# Altium PCB MicroPlayerPCB.PcbDoc
Units mm, origin at the board's own origin, x right, y up, seen from the top; angles counter-clockwise.
Board outline 26 x 30 mm, 4 copper layers (Top Layer 1, Top Layer 2, Bottom Layer 2, Bottom Layer 1), stack 1.282 mm thick; 84 components, 66 nets, 330 pads, 151 vias.
Unrouted connection lines stored in the file: 1.
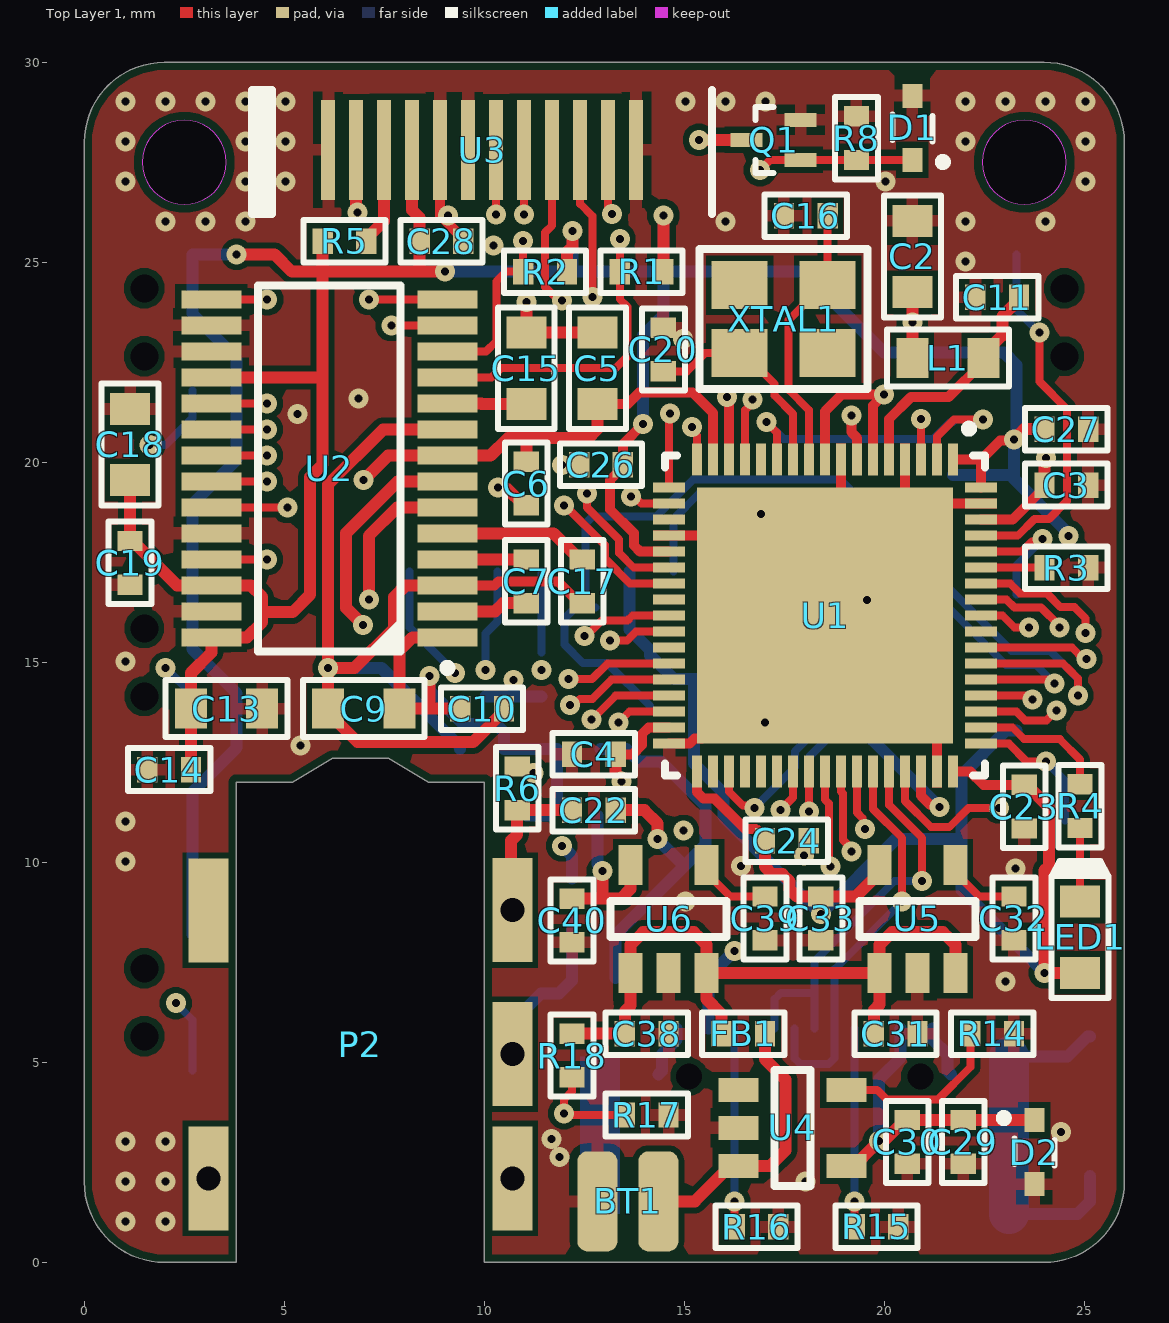
[diagram p0: Top Layer 1 view]
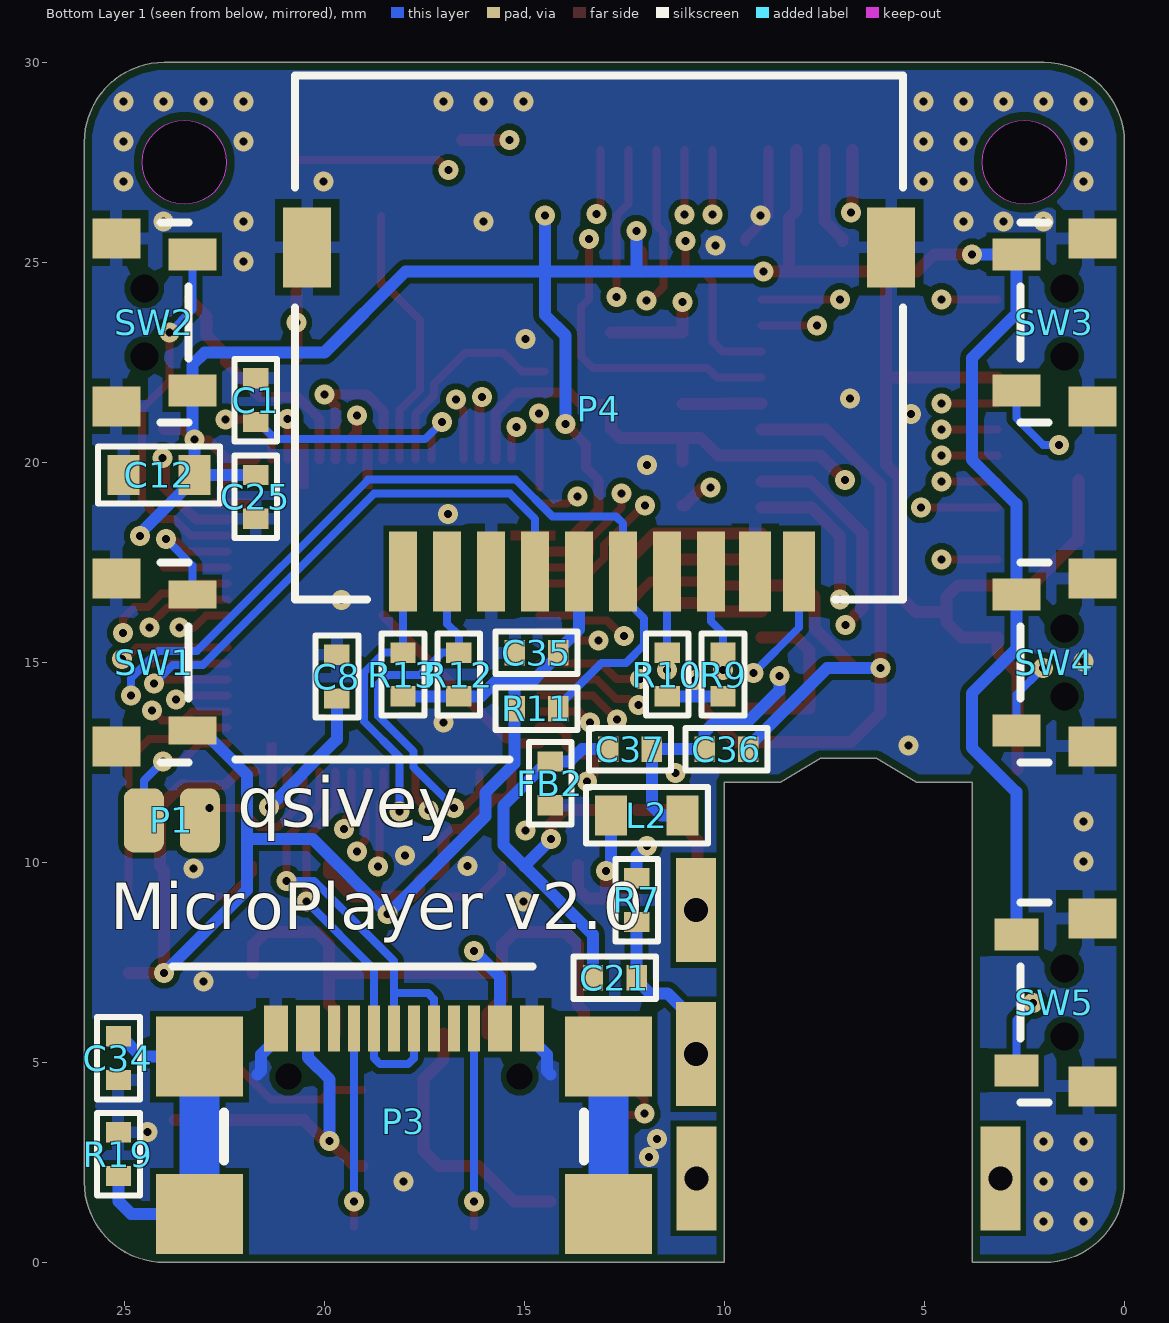
[diagram p1: Bottom Layer 1 view, seen from below]
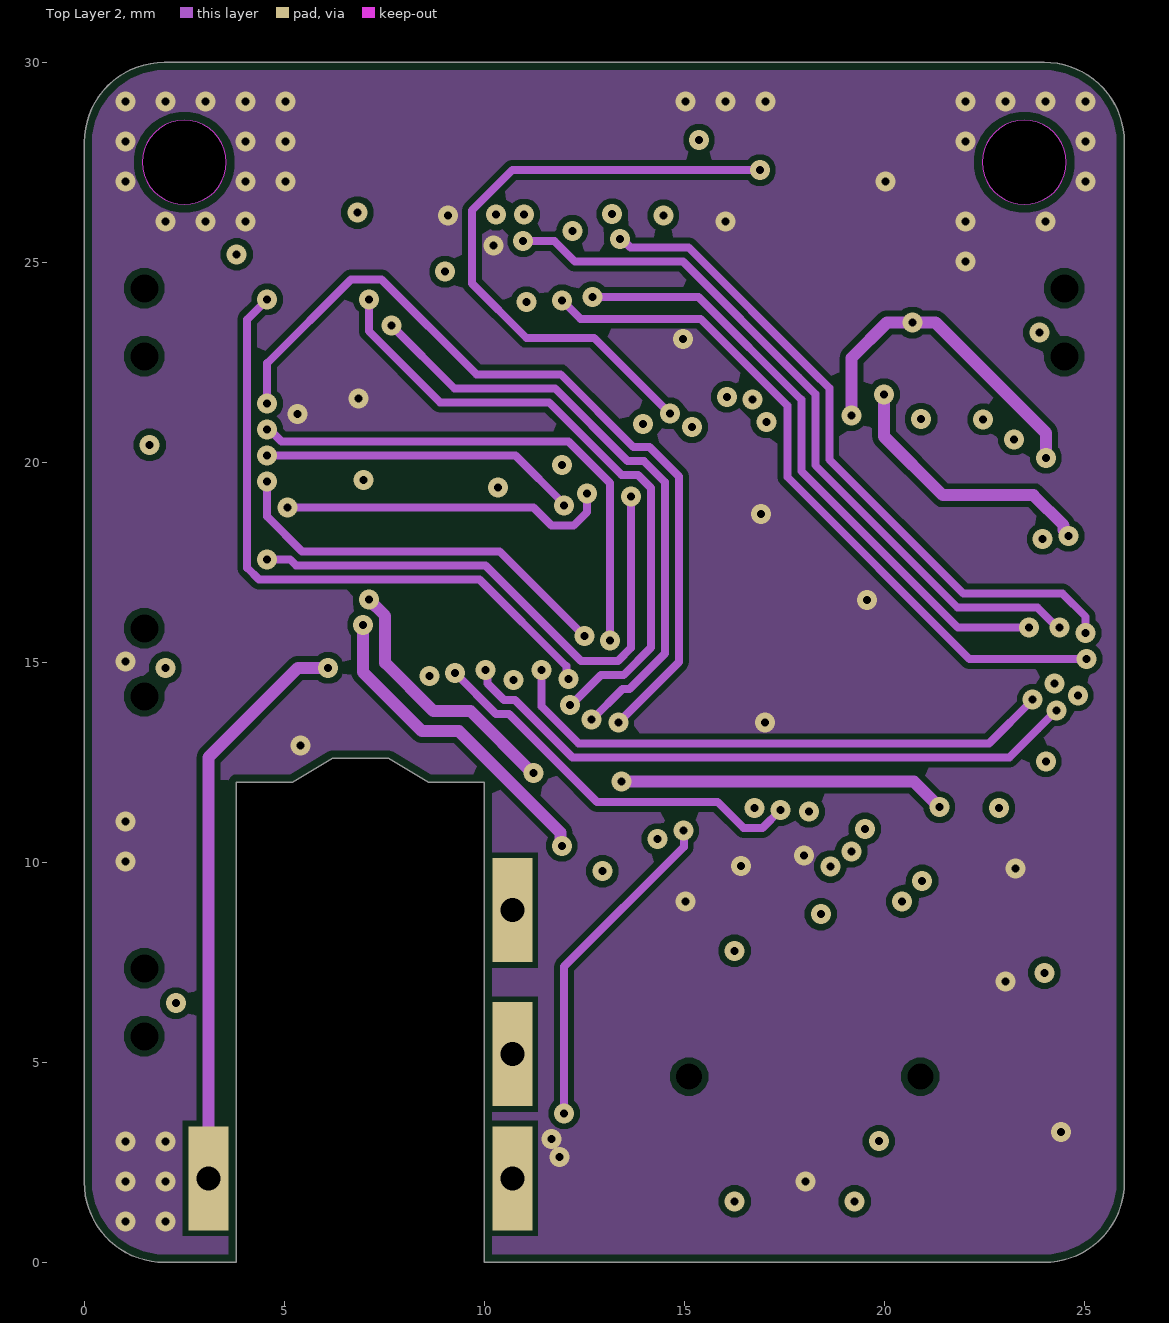
[diagram p2: Top Layer 2]
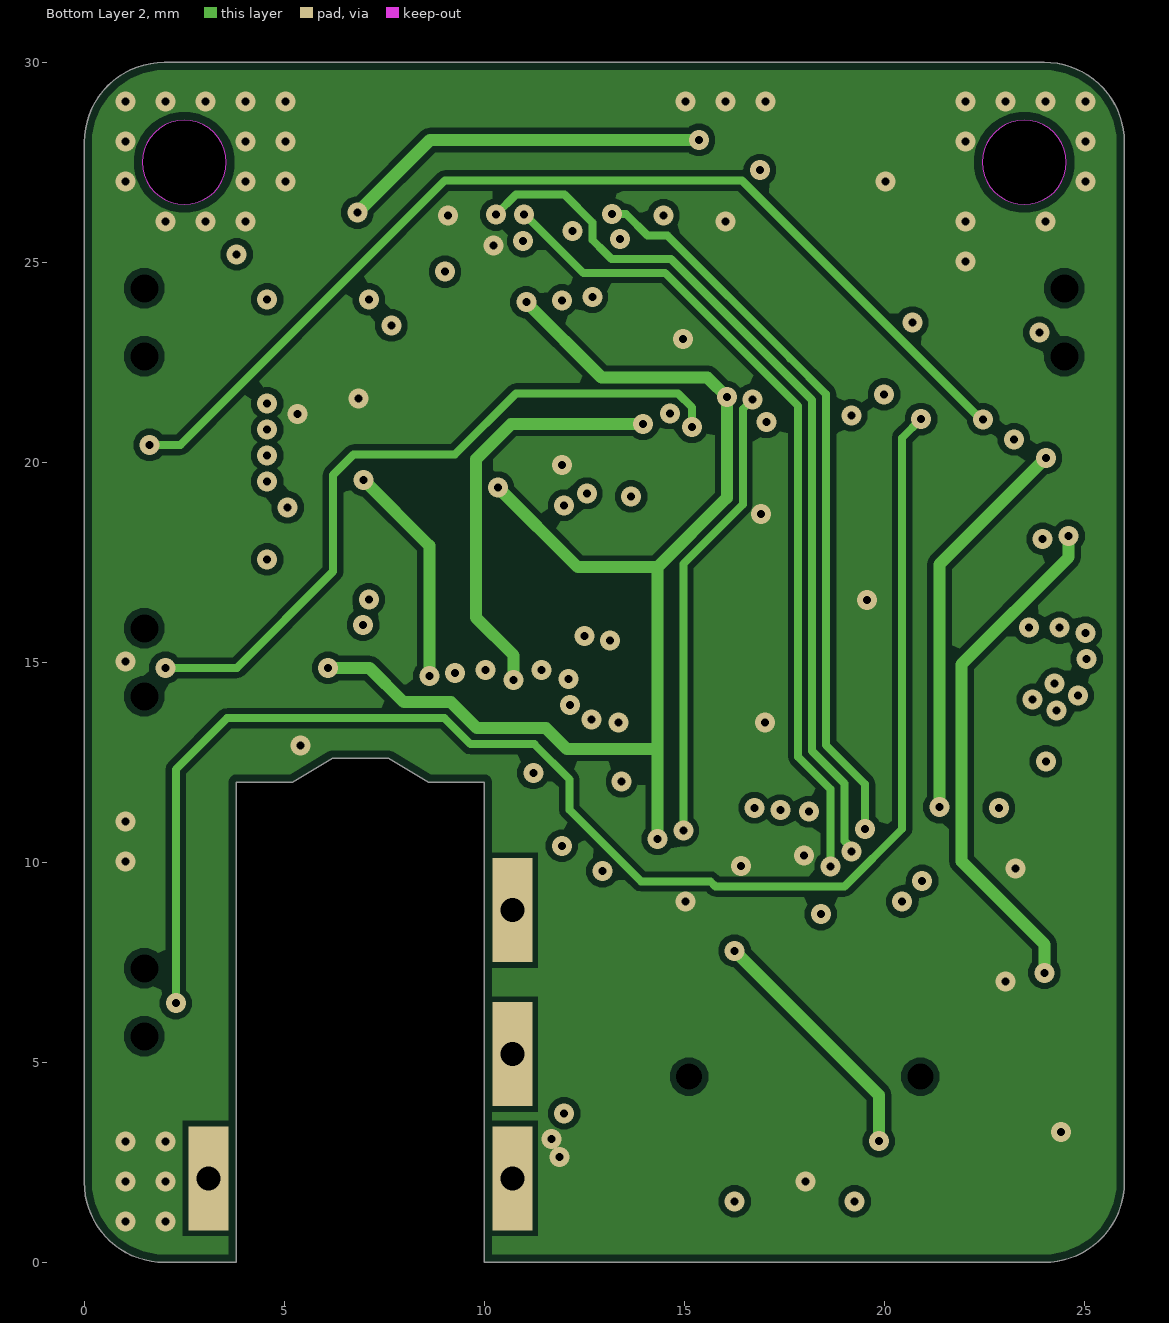
[diagram p3: Bottom Layer 2]
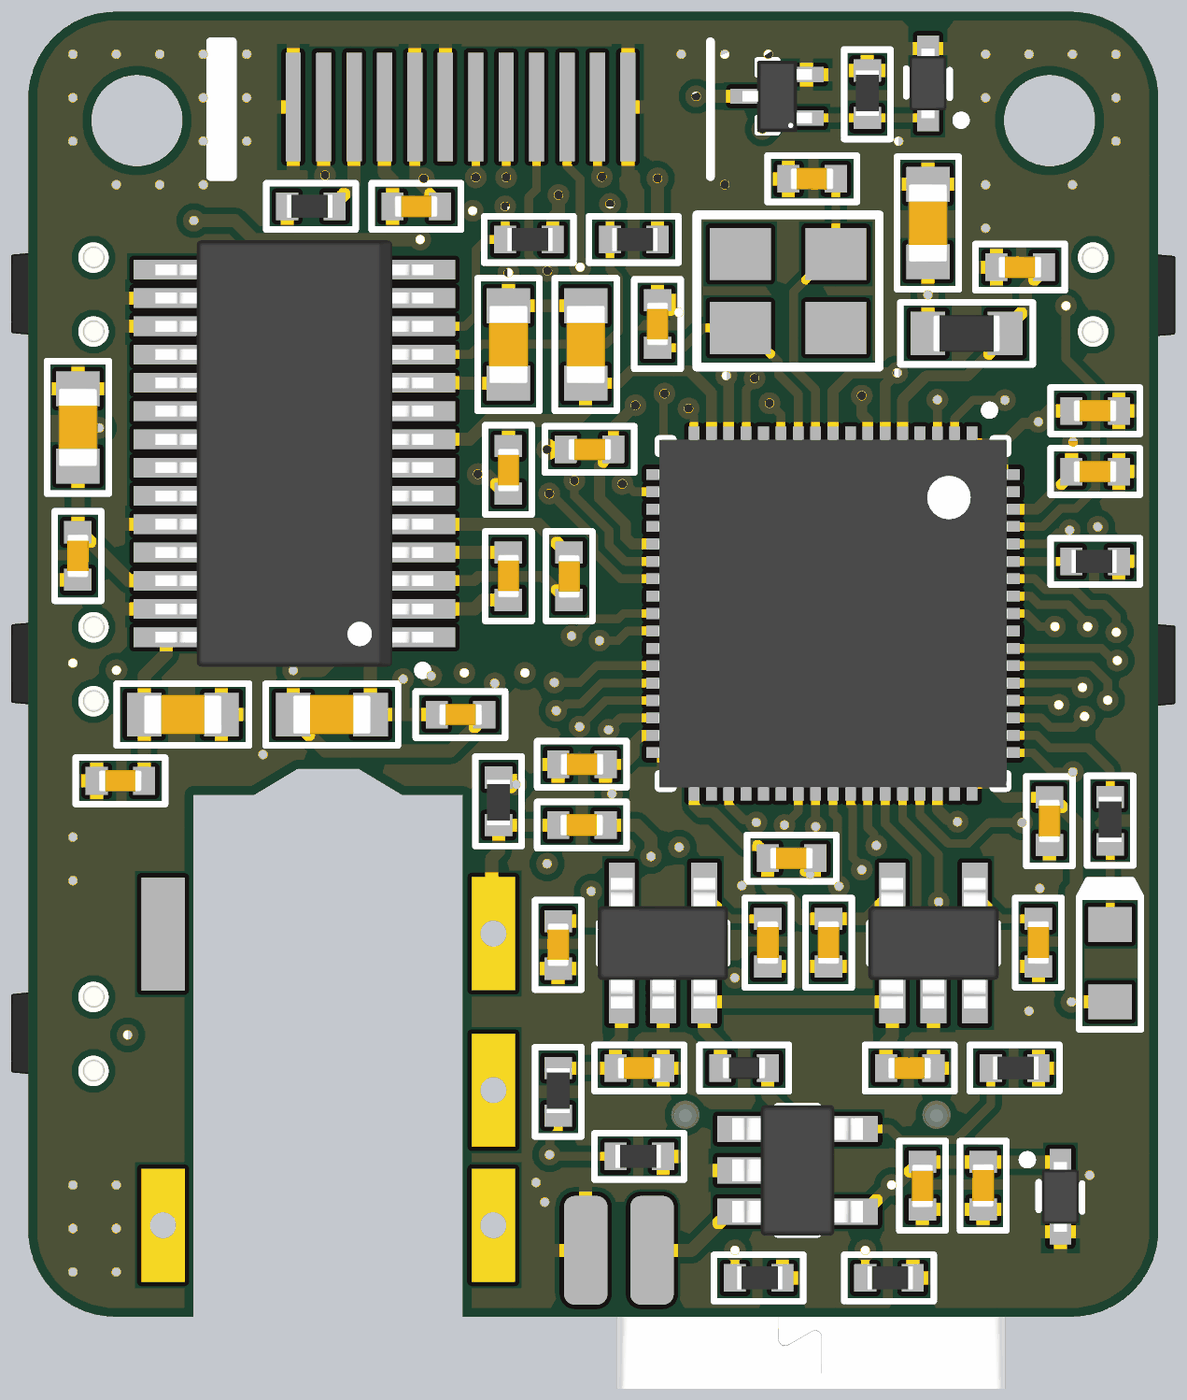
[diagram p4: 3D render of the assembled board from above, using the file's embedded part models]
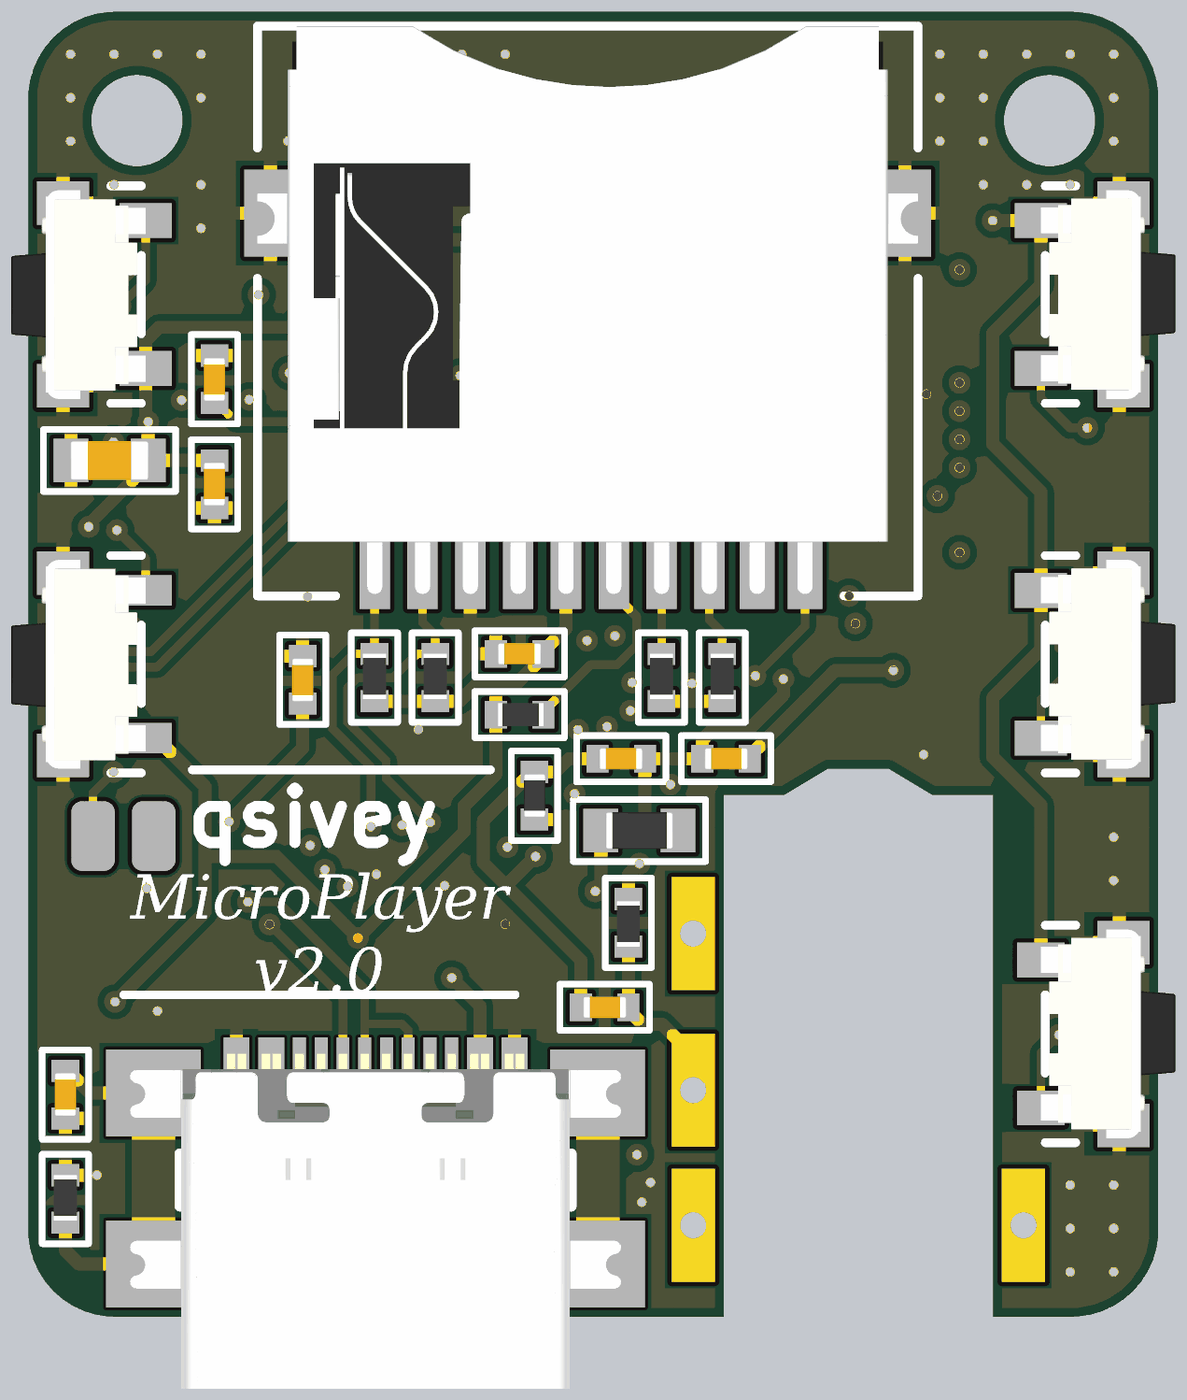
[diagram p5: 3D render of the assembled board from below, using the file's embedded part models]

## Layer stack, top to bottom
Top Solder: solder mask 0.01, Solder Resist, Dk 3.5
Top Layer 1: signal copper 0.035
Dielectric 2: prepreg 0.0711, PP-006, Dk 4.1
Top Layer 2: signal copper 0.035
Dielectric 1: dielectric 1, FR-4, Dk 4.8
Bottom Layer 2: signal copper 0.035
Dielectric 3: prepreg 0.0711, PP-006, Dk 4.1
Bottom Layer 1: signal copper 0.035
Bottom Solder: solder mask 0.01, Solder Resist, Dk 3.5

## Board outline
2,0 cw(c2,2) 0,2 0,28 cw(c2,28) 2,30 24,30 cw(c24,28) 26,28 26,2 cw(c24,2) 24,0 10,0 10,12 8.6,12 7.6,12.6 6.2,12.6 5.2,12 3.8,12 3.8,0
cut-out: 23.5,28.55 ccw(c23.5,27.5) 22.45,27.5 ccw(c23.5,27.5) 23.5,26.45 ccw(c23.5,27.5) 24.55,27.5 ccw(c23.5,27.5) 23.5,28.55
cut-out: 2.5,28.55 ccw(c2.5,27.5) 1.45,27.5 ccw(c2.5,27.5) 2.5,26.45 ccw(c2.5,27.5) 3.55,27.5 ccw(c2.5,27.5) 2.5,28.55

## Design rules (kind name [scope] priority, off if disabled: settings)
AssemblyTestPointUsage [All] p1 off:
AssemblyTestpoint [All] p1 off: testpointundercomponent=TRUE minsize=1.016 maxsize=2.54 preferedsize=1.524 minholesize=0 maxholesize=1.016 preferedholesize=0.813 testpointgrid=0.025 usegrid=TRUE gridtolerance=0 allowsidetop=TRUE allowsidebottom=TRUE
BoardOutlineClearance [All] p1: gap=0.2 ignorepadtopadclearanceinfootprint=FALSE
Clearance [All] p1: gap=0.15 ignorepadtopadclearanceinfootprint=FALSE
ComponentClearance [All] p1 off: gap=0 collisioncheckmode=3 verticalgap=0 showdistances=FALSE
DiffPairsRouting [All] p1 off: maxlimit=0.254 minlimit=0.254 mostfreqgap=0.254 toplayer_minwidth=0.381 toplayer_maxwidth=0.381 toplayer_prefwidth=0.381 midlayer1_minwidth=0.381 midlayer1_maxwidth=0.381 midlayer1_prefwidth=0.381 midlayer2_minwidth=0.381 midlayer2_maxwidth=0.381 midlayer2_prefwidth=0.381 bottomlayer_minwidth=0.381 bottomlayer_maxwidth=0.381 bottomlayer_prefwidth=0.381 maxuncoupledlength=12.7
FabricationTestPointUsage [All] p1 off: valid=0 allowmultiple=FALSE
FabricationTestpoint [All] p1 off: side=3 testpointundercomponent=TRUE minsize=1.016 maxsize=2.54 preferedsize=1.524 minholesize=0 maxholesize=1.016 preferedholesize=0.813 testpointgrid=0.025 allowsidetop=TRUE allowsidebottom=TRUE usegrid=TRUE gridtolerance=0
FanoutControl Fanout_BGA [IsBGA] p1 off: bgadir=Out bgaviamode=Centered fanoutstyle=Auto fanoutdirection=Alternating viagrid=0.025 // Fanout_BGA (Default Rule)
Height [All] p1: minheight=0 maxheight=100 prefheight=0.5
HoleSize [All] p1: absolutevalues=TRUE maxlimit=100 minlimit=0.2 maxpercent=80.000 minpercent=20.000
HoleToHoleClearance [All] p1: gap=0.2 allowstackedmicrovias=TRUE
MinimumAnnularRing [All] p1: minimumring=0.15
MinimumSolderMaskSliver [All] p1: minsoldermaskwidth=0
PlaneClearance [All] p1: clearance=0.3
PlaneConnect [All] p1: planeconnectstyle=Relief reliefexpansion=0.5 reliefentries=4 reliefconductorwidth=0.3 reliefairgap=0.3
PolygonConnect PolygonConnectVias [InNet('DGND') vs isVia] p1: connectstyle=Direct reliefconductorwidth=0.254 reliefentries=4 polygonreliefangle="90 Angle" airgapwidth=0.254
PolygonConnect [All] p2: connectstyle=Relief reliefconductorwidth=0.3 reliefentries=4 polygonreliefangle="90 Angle" airgapwidth=0.2
RoutingCorners [All] p1: cornerstyle=45-Degree minsetback=0.635 maxsetback=0.635
RoutingVias [All] p1: holewidth=0.4 width=0.8 viastyle="Through Hole" minholewidth=0.2 minwidth=0.5 maxholewidth=0.5 maxwidth=1
SMDEntry [All] p1: side=TRUE corner=TRUE anyangle=FALSE
SMDNeckDown [All] p1: percent=100.000
SMDToCorner [All] p1: distance=39370
SilkToSilkClearance [All] p1: silktosilkclearance=0.2
SilkToSolderMaskClearance [IsPad] p1: minsilkscreentomaskgap=0.03 clearancetoexposedcopper=FALSE
SolderMaskExpansion SolderMaskExpansionVias [isVia] p1: expansion=0.102 istentingtop=TRUE
SolderMaskExpansion [All] p2: expansion=0.102 istentingtop=FALSE
Width [All] p1: maxlimit=1 minlimit=0.2 preferedwidth=0.3
10 further rules are at their usual default settings.

## Components (designator, comment, footprint, x,y, rotation, side; value= is the part's Value field where it differs from the comment)
BT1 "3.7V" _2-PAD-SM#1 14.351,1.524 r180 top
C1 "100nF" C0402 21.717,22.098 r270 bottom
C2 "10uF" C0603 20.701,26.035 r270 top
C3 "2.2uF" C0402 25.095,19.431 r180 top
C4 "2.2uF" C0402 12.192,12.7 r0 top
C5 "10uF" C0603 12.827,21.463 r90 top
C6 "100nF" C0402 11.049,20.015 r270 top
C7 "2.2uF" C0402 11.049,16.479 r90 top
C8 "2.2uF" C0402 19.685,15.189 r270 bottom
C9 "10uF" C0603 7.874,13.843 r180 top
C10 "100nF" C0402 9.398,13.843 r0 top
C11 "220pF" C0402 23.368,24.13 r180 top
C12 "10uF" C0603 23.241,19.685 r0 bottom
C13 "10uF" C0603 2.667,13.843 r0 top
C14 "100nF" C0402 2.667,12.319 r180 top
C15 "10uF" C0603 11.049,21.463 r90 top
C16 "12pF" C0402 18.583,26.162 r180 top
C17 "2.2uF" C0402 12.446,17.571 r270 top
C18 "10uF" C0603 1.143,21.336 r270 top
C19 "100nF" C0402 1.143,16.942 r90 top
C20 "12pF" C0402 14.478,22.276 r90 top
C21 "2.2nF" C0402 13.284,7.112 r180 bottom
C22 "2.2nF" C0402 13.284,11.303 r180 top
C23 "100nF" C0402 23.495,10.846 r90 top
C24 "100nF" C0402 18.11,10.541 r180 top
C25 "100nF" C0402 21.717,18.593 r90 bottom
C26 "100nF" C0402 12.37,19.939 r0 top
C27 "100nF" C0402 25.095,20.828 r180 top
C28 "100nF" C0402 9.474,25.527 r180 top
C29 "100nF" C0402 21.971,2.464 r90 top
C30 "1uF" C0402 20.574,3.556 r270 top
C31 "1uF" C0402 20.828,5.715 r180 top
C32 "10nF" C0402 23.241,8.052 r90 top
C33 "1uF" C0402 18.415,8.052 r90 top
C34 "100nF" C0402 25.146,4.558 r90 bottom
C35 "2.2uF" C0402 14.148,15.24 r0 bottom
C36 "1uF" C0402 10.49,12.827 r180 bottom
C37 "100nF" C0402 11.811,12.827 r0 bottom
C38 "100nF" C0402 14.605,5.715 r180 top
C39 "10nF" C0402 17.018,8.052 r90 top
C40 "1uF" C0402 12.192,8.001 r90 top
D1 "PESD5V0S1UB" SOD-523 20.701,29.159 r270 top
D2 "PESD5V0S1UB" SOD-523 23.749,1.956 r90 top
FB1 "EPZ1005E221-1R2T" L0402 17.018,5.715 r180 top value=100uH
FB2 "EPZ1005E221-1R2T" L0402 14.351,11.43 r90 bottom value=100uH
L1 "10uH" L0603 20.701,22.606 r0 top
L2 "10uH" L0603 12.827,11.176 r180 bottom
LED1 "GNL5012" LED0603 24.892,7.239 r90 top
P1 "P2" _2-PAD-SM#2 24.511,7.747 r90 bottom
P2 "ST-033" _3-PAD-TH 0.718,13.249 r90 top
P3 "USB4110-GF-A" USB-TYPE-C 21.209,5.842 r180 bottom
P4 "microSD Card Holder" SD-05 10.328,16.972 r180 bottom
Q1 "2SK3019TL" SOT-416FL 17.907,27.559 r180 top
R1 "2.2K" R0402 14.466,24.766 r180 top
R2 "2.2K" R0402 12.053,24.766 r180 top
R3 "10K" R0402 24.015,17.365 r0 top
R4 "1K" R0402 24.892,11.938 r270 top
R5 "160" R0402 5.969,25.527 r0 top
R6 "470" R0402 10.821,11.315 r90 top
R7 "470" R0402 12.191,8.521 r90 bottom
R8 "47K" R0402 19.303,28.639 r270 top
R9 "47K" R0402 10.034,15.228 r270 bottom
R10 "47K" R0402 11.429,15.228 r270 bottom
R11 "47K" R0402 14.16,13.844 r0 bottom
R12 "47K" R0402 16.637,15.228 r270 bottom
R13 "47K" R0402 18.035,15.228 r270 bottom
R14 "10K" R0402 23.229,5.716 r180 top
R15 "5.1K" R0402 20.339,0.89 r180 top
R16 "5.1K" R0402 17.339,0.89 r180 top
R17 "100K" R0402 13.525,3.682 r0 top
R18 "100K" R0402 12.191,5.703 r270 top
R19 "1M" R0402 25.147,3.239 r270 bottom
SW1 "" BUT-SMD-4X3.5X2MM#1 23.3,13.3 r90 bottom
SW2 "" BUT-SMD-4X3.5X2MM#2 23.3,21.8 r90 bottom
SW3 "" BUT-SMD-4X3.5X2MM#2 2.7,25.2 r270 bottom
SW4 "" BUT-SMD-4X3.5X2MM#2 2.7,16.7 r270 bottom
SW5 "" BUT-SMD-4X3.5X2MM#3 2.7,8.2 r270 bottom
U1 "STM32H735RGV6" VFQFPN68 21.717,20.066 r270 top
U2 "PCM5142" TSSOP28 9.075,15.621 r180 top
U3 "ST7789" 1.3INCH_LCD_WELDED 6.096,27.813 r0 top
U4 "STC4054" SOT-23-5 16.35,4.313 r0 top
U5 "LD3985M33R" SOT-23-5 19.878,7.239 r90 top
U6 "LD3985M33R" SOT-23-5 13.655,7.239 r90 top
XTAL1 "16 MHz" 7U 19.183,22.233 r180 top

## Footprints (in the part's own frame and the unit in brackets; to place one, negate y for a bottom-side part, rotate by r counter-clockwise, add the part's x,y. Pads: shape width x height; smd on the part's side, far side on the other; paste and mask are expansions set on the pad)
1.3INCH_LCD_WELDED [mm]
  rect 0.35x2.5 smd: 1(0,0) 2(0.7,0) 3(1.4,0) 4(2.1,0) 5(2.8,0) 6(3.5,0) 7(4.2,0) 8(4.9,0) 9(5.6,0) 10(6.3,0) 11(7,0) 12(7.7,0)
  silkscreen extent -1.9,-1.6 9.6,1.5
7U [mm] "7U Series SMD Crystal Units"
  rect 1.4x1.2 smd: 0(0.6,-0.5) 0(2.8,-2.2) 1(0.6,-2.2) 2(2.8,-0.5)
  silkscreen extent -0.4,-3.1 3.8,0.4
_2-PAD-SM#1 [mm]
  rrect50% 1x2.5 smd: 1(0,0) 2(1.524,0)
_2-PAD-SM#2 [mm]
  rrect50% 1.6x1 smd: 1(3.302,0) 2(3.302,-1.397)
_3-PAD-TH [mm]
  rect 2.6x1 hole 0.6: 1(-4.442,-9.985) 2(-8.042,-9.985) 3(-11.149,-2.382)
BUT-SMD-4X3.5X2MM#1 [mm]
  rect 1x1.2 smd: 0(-0.4,1.9) 0(3.8,1.9)
  rect 0.7x1.2 smd: 1(0,0) 2(3.4,0)
  silkscreen extent -0.8,0.1 4.2,0.8, body extent -0.7,0 4.1,3.09, height 1.9
BUT-SMD-4X3.5X2MM#2 [mm]
  rect 1x1.2 smd: 0(-0.4,1.9) 0(3.8,1.9)
  rect 0.8x1.2 smd: 1(0,0) 2(3.4,0)
  round 0 hole 0.7 unplated: ""(0.85,1.2) ""(2.55,1.2)
  silkscreen extent -0.8,0.1 4.2,0.8, body extent -0.7,0 4.1,3.09, height 1.9
BUT-SMD-4X3.5X2MM#3 [mm]
  rect 1x1.2 smd: 0(-0.4,1.9) 0(3.8,1.9)
  rect 0.8x1.1 smd: 1(0,0) 2(3.4,0)
  round 0 hole 0.7 unplated: ""(0.85,1.2) ""(2.55,1.2)
  silkscreen extent -0.8,0.1 4.2,0.8, body extent -0.7,0 4.1,3.09, height 1.9
C0402 [mil]
  rect 20x25 smd: 1(0,0) 2(43,0)
  silkscreen extent -19,-21 62,21, body extent 2,-10 41,10, height 14
C0603 [mm]
  rect 0.8x1 smd: 1(0,0) 2(1.778,0)
  silkscreen extent -0.64,-0.71 2.41,0.71, body extent -0.01,-0.45 1.79,0.45, height 0.8
L0402 [mil]
  rect 20x25 smd: 1(0,0) 2(43,0)
  silkscreen extent -19,-21 62,21, body extent 2,-10 41,10, height 14
L0603 [mm]
  rect 0.8x1 smd: 1(0,0) 2(1.778,0)
  silkscreen extent -0.64,-0.71 2.41,0.71, body extent 0.11,-0.43 1.66,0.43, height 0.45
LED0603 [mm]
  rect 0.8x1 smd: 1(0,0) 2(1.778,0)
  silkscreen extent -0.64,-0.71 2.79,0.71, body extent -0.07,-0.45 1.85,0.45, height 0.4
R0402 [mil]
  rect 20x25 smd: 1(-0.47,0.04) 2(42.53,0.04)
  silkscreen extent -19,-21 62,21, body extent 0,-10 40,10, height 16
SD-05 [mm] "uSD Card Slot"
  rect 1.2x2 smd: 0(-10.1,8.4) 0(4.5,8.4)
  rect 0.7x2 smd: 1(0,0.3) 2(-1.1,0.3) 3(-2.2,0.3) 4(-3.3,0.3) 5(-4.4,0.3) 6(-5.5,0.3) 7(-6.6,0.3) 8(-7.7,0.3)
  rect 0.8x2 smd: 9(2.2,0.3) 10(1.1,0.3)
  silkscreen extent -10.4,-0.4 4.8,12.7, body extent -10.4,-0.36 4.8,12.7, height 1.87
SOD-523 [mm] "SSMini2, SC-79"
  rect 0.6x0.5 smd: 1(0,0) 2(1.6,0)
  silkscreen extent 0.47,-0.5 1.75,0.86, body extent 0,-0.43 1.6,0.43, height 0.6
SOT-23-5 [mm] "SOT-753"
  rect 1x0.6 smd: 1(0,0) 2(0,-0.95) 3(0,-1.9) 4(2.7,-1.9) 5(2.7,0)
  silkscreen extent 0.9,-2.4 1.8,0.5, body extent -0.15,-2.45 2.85,0.55, height 1.2
SOT-416FL [mm] "SC-89 (EMT3)"
  rect 0.8x0.35 smd: 1(0,0) 2(0,-1) 3(1.35,-0.5)
  silkscreen extent 0.67,-1.32 1.12,0.33, body extent -0.13,-1.32 1.48,0.32, height 0.73
TSSOP28 [mm]
  rect 1.5x0.45 smd: 1(0,0) 2(0,-0.65) 3(0,-1.3) 4(0,-1.95) 5(0,-2.6) 6(0,-3.25) 7(0,-3.9) 8(0,-4.55) 9(0,-5.2) 10(0,-5.85) 11(0,-6.5) 12(0,-7.15) 13(0,-7.8) 14(0,-8.45) 15(5.9,-8.45) 16(5.9,-7.8) 17(5.9,-7.15) 18(5.9,-6.5) 19(5.9,-5.85) 20(5.9,-5.2) 21(5.9,-4.55) 22(5.9,-3.9) 23(5.9,-3.25) 24(5.9,-2.6) 25(5.9,-1.95) 26(5.9,-1.3) 27(5.9,-0.65) 28(5.9,0)
  silkscreen extent -0.1,-8.8 4.73,0.86, body extent -0.25,-9.13 6.15,0.67, height 1.2
USB-TYPE-C [mm]
  rect 2.18x2 smd mask+0.07: 0(-1.91,-4.63) 0(-1.91,-0.7) 0(8.31,-4.63) 0(8.31,-0.7)
  rect 0.6x1.15 smd mask+0.07: 1(0,0) 2(0.8,0) 11(5.6,0) 12(6.4,0)
  rect 0.3x1.15 smd mask+0.07: 3(1.45,0) 4(1.95,0) 5(2.45,0) 6(2.95,0) 7(3.45,0) 8(3.95,0) 9(4.45,0) 10(4.95,0)
  round 0 hole 0.65 unplated: ""(0.31,-1.2) ""(6.09,-1.2)
  silkscreen extent -1.3,-3.3 7.7,-2.1, body extent -2.45,-7.5 8.85,0.2, height 3.26
VFQFPN68 [mm]
  rect 6.4x6.4 smd: 0(3.9,-3.2)
  rect 0.8x0.25 smd: 1(0,0) 2(0,-0.4) 3(0,-0.8) 4(0,-1.2) 5(0,-1.6) 6(0,-2) 7(0,-2.4) 8(0,-2.8) 9(0,-3.2) 10(0,-3.6) 11(0,-4) 12(0,-4.4) 13(0,-4.8) 14(0,-5.2) 15(0,-5.6) 16(0,-6) 17(0,-6.4) 35(7.8,-6.4) 36(7.8,-6) 37(7.8,-5.6) 38(7.8,-5.2) 39(7.8,-4.8) 40(7.8,-4.4) 41(7.8,-4) 42(7.8,-3.6) 43(7.8,-3.2) 44(7.8,-2.8) 45(7.8,-2.4) 46(7.8,-2) 47(7.8,-1.6) 48(7.8,-1.2) 49(7.8,-0.8) 50(7.8,-0.4) 51(7.8,0)
  rect 0.25x0.8 smd: 18(0.7,-7.1) 19(1.1,-7.1) 20(1.5,-7.1) 21(1.9,-7.1) 22(2.3,-7.1) 23(2.7,-7.1) 24(3.1,-7.1) 25(3.5,-7.1) 26(3.9,-7.1) 27(4.3,-7.1) 28(4.7,-7.1) 29(5.1,-7.1) 30(5.5,-7.1) 31(5.9,-7.1) 32(6.3,-7.1) 33(6.7,-7.1) 34(7.1,-7.1) 52(7.1,0.7) 53(6.7,0.7) 54(6.3,0.7) 55(5.9,0.7) 56(5.5,0.7) 57(5.1,0.7) 58(4.7,0.7) 59(4.3,0.7) 60(3.9,0.7) 61(3.5,0.7) 62(3.1,0.7) 63(2.7,0.7) 64(2.3,0.7) 65(1.9,0.7) 66(1.5,0.7) 67(1.1,0.7) 68(0.7,0.7)
  silkscreen extent -0.87,-7.2 7.9,0.8, body extent -0.11,-7.21 7.91,0.81, height 1

## Part data
BT1: library part Battery, Link=https://www.chipdip.ru/product/robiton-lp303030, Name=LP303030
C1 C2 C3 C4 C5 C7 C8 C9 C11 C12 C13 C15 C17 C18 C21 C22 C23 C24 C25 C26 C27 C28 C29 C30 C31 C32 C33 C34 C35 C38 C39 C40: library part Cap, Case=DNP, Part Number=N/A, Tolerance=5%, Voltage=250V
C6 C10 C14 C16 C19 C20 C36 C37: library part Cap, Case=0603, Tolerance=5%, Voltage=250V
D1 D2: library part Suppressor, Case=SOD-523, Link=https://www.chipdip.ru/product/pesd5v0s1ub, Name=PESD5V0S1UB
FB1 FB2: library part "Ferrite Bead", Case=0402, Name=EPZ1005E221-1R2T
L1: library part Inductor, Case=DNP, Part Number=N/A, Tolerance=5%
L2: library part Inductor, Case=0805, Part Number=LQM21FN100N00K, Tolerance=30%, Link=https://www.chipdip.ru/product/lqm21fn100n
LED1: library part LED, Case=DNP, Part Number=N/A, Name=GNL5012
P1: Case=DNP, Part Number=N/A, Name=DS1021
P2: library part "AJack Socket Stereo", Name=ST-033
P3: library part "USB Type C with 0", Case=DNP, Part Number=N/A, Name=USB4110-GF-A
P4: library part MicroSD-CD2, Name="microSD Card Holder"
Q1: library part MOSFET-N, Case=SOT-416, Link=https://www.chipdip.ru/product/2n7002-umw, Name=2SK3019TL
R1 R2 R3 R5 R6 R7 R8 R9 R10 R11 R12 R13 R14 R15 R16 R17 R18 R19: library part Res, Power=0.125W, Tolerance=5%
R4: library part Res, Case=0603, Power=0.125W, Tolerance=5%
SW1 SW2 SW3 SW4 SW5: library part Button
U1: library part STM32H735Rxxx, Case=DNP, Part Number=N/A, Name=STM32H735RGV6
U2: library part PCM514x, "2-VRMS DirectPath™, 112/106-dB Audio Stereo DAC With 32-bit, 384-kHz PCM Interface", Case=DNP, Part Number=N/A, Name=PCM5142
U3: library part "1.3inch TFT LCD 12-pin", "135x240 Display", Part Number=N/A, Name=ST7789
U4: "800mA Standalone linear Li-Ion Battery charger with thermal regulation", Case=SOT-23-5, Part Number=N/A, Name=STC4054
U5 U6: library part LD3985, "Ultra low drop and low noise BiCMOS voltage regulators, 150 mA", Case=SOT-23-5, Link=https://www.chipdip.ru/product/ld3985m33r, Name=LD3985M33R
XTAL1: library part Crystal, Case=7U, Part Number=N/A, Tolerance=0.001%, Name=SJK-7U

## Free pads (board coordinates)
  rect 1x2.6 smd: ""(3.1,8.8)
  rect 1x2.6 hole 0.6: ""(10.7,2.1)

## Via types
v1: diameter 0.5, hole 0.2, Top Layer 1 to Bottom Layer 1, tented both sides, 151 vias

## Nets (pads, with @x,y where several pads share a name; then routed paths per layer and width w, separated by ;. In a path a pad name is that pad's centre, name@x,y a point inside that pad or via, vN(x,y) a via of type N, cw(c..) or ccw(c..) an arc to the next point about the centre after c; other vN are vias at no path point)
+3.3V: C12.1 C13.1 C14.1 C18.2 C19.2 C23.2 C24.2 C25.2 C26.2 C27.2 C28.2 C33.2 C35.1 LED1.1 P4.4 R1.1 R2.1 R5.1 R9.2 R10.2 R11.2 R12.2 R13.2 SW1.1 SW2.1 SW3.1 SW4.1 SW5.1 U1.1 U1.6 U1.9 U1.22 U1.35 U1.51 U1.68 U2.18 U2.26 U2.28 U3.4 U5.5 | length 168.7
  Top Layer 1 w0.25: v1(13.97,20.955) 13.462,20.447 13.462,19.875 13.333,19.747 13.144,19.557 13.144,18.823 13.738,18.229 13.738,17.924 13.896,17.766 U1.22 ; U1.35@15.317,12.242 15.317,11.752 15.478,11.591 15.762,11.591 16.515,10.838 16.785,10.838 17.018,10.604 C24.2 ; U1.9 18.517,21.276 18.941,21.7 v1(19.993,21.7) 19.717,21.424 19.717,20.58 19.717,20.323 U1.6 ; U1.51 22.15,12.266 22.478,11.938 C23.2 ; U1.1 22.417,20.066 ; U1.68 22.417,20.066 ; v1(23.241,20.574) 23.207,20.54 22.891,20.54 22.417,20.066
  Top Layer 1 w0.3: C18.2 1.143,18.388 C19.2 1.206,18.034 2.32,16.921 U2.26 4.161,16.921 4.445,16.637 4.445,16.283 ; C14.1 C13.1 2.667,14.732 3.175,15.24 U2.28 4.064,15.621 4.445,16.002 4.445,16.283 ; U2.18 5.957,22.121 ; v1(3.81,25.2) 4.753,25.2 5.188,24.765 5.957,24.765 ; R5.1 5.957,24.765 ; U3.4 8.196,26.302 8.382,26.116 8.382,24.765 ; v1(9.017,24.765) 8.382,24.765 ; R2.1 12.065,25.251 12.2,25.386 v1(12.2,25.789) ; R1.1 v1(14.478,26.172) ; C24.2 17.018,9.89 17.202,9.706 17.452,9.706 17.635,9.522 17.635,9.32 17.811,9.144 C33.2 ; v1(18.415,8.706) C33.2 ; U5.5 19.878,9.739 19.283,9.144 C33.2 ; v1(23.241,20.574) 23.495,20.828 C27.2 ; C23.2 23.558,11.938 24.112,11.384 24.112,9.905 24.003,9.796 v1(24.003,7.239) LED1.1 ; 4.445,16.283 4.472,16.256 5.207,16.256 5.647,16.696 5.647,19.635 5.957,19.944 5.957,24.765 ; 5.957,24.765 8.382,24.765
  Top Layer 2 w0.3: v1(19.993,21.7) 19.993,20.647 21.463,19.177 23.728,19.177 24.482,18.423 24.482,18.314 24.608,18.187 v1(24.608,18.16)
  Bottom Layer 2 w0.3: v1(10.731,14.56) 10.731,15.176 9.793,16.115 9.793,20.08 10.668,20.955 v1(13.97,20.955) ; v1(24.003,7.239) 24.003,7.951 21.929,10.025 21.929,14.951 24.608,17.63 v1(24.608,18.16)
  Bottom Layer 1 w0.3: SW5.1 2.7,11.756 3.81,12.866 3.81,14.224 2.7,15.334 SW4.1 2.7,18.956 3.81,20.066 3.81,22.606 2.7,23.716 SW3.1 v1(3.81,25.2) ; v1(9.017,24.765) 12.192,24.765 ; R9.2 10.731,14.148 ; v1(10.731,14.56) 10.731,14.148 ; R10.2@11.43,14.148 10.731,14.148 ; v1(12.2,25.789) 12.2,24.773 12.192,24.765 ; P4.4 13.628,15.823 14.148,15.303 14.148,15.176 14.739,14.585 15.192,14.585 ; v1(13.97,20.955) 13.97,23.17 14.478,23.678 14.478,24.765 ; v1(14.478,26.172) 14.478,24.765 ; R13.2 R12.2 16.083,14.148 15.646,14.585 15.192,14.585 ; C25.2 C12.1 ; SW1.1 23.05,13.3 21.929,12.179 21.929,10.583 ; v1(24.003,7.239) 21.929,9.313 21.929,10.583 ; v1(24.608,18.16) 24.608,18.214 24.51,18.313 24.51,18.316 23.241,19.585 C12.1 ; 12.192,24.765 14.478,24.765 ; 14.478,24.765 17.977,24.765 19.995,22.746 22.993,22.746 23.3,22.439 SW2.1 23.3,20.687 23.241,20.628 C12.1 ; 15.192,14.585 15.24,14.538 R11.2 15.24,12.474 15.975,11.738 15.975,11.145 v1(18.415,8.706) 20.292,10.583 21.929,10.583
+3.3VA: C5.1 C6.1 C9.1 C10.1 C36.1 C37.1 L2.2 U1.16 U2.1 U2.8 | length 29.4
  Top Layer 1 w0.25: C5.1 13.589,21.463 13.873,21.747 15.209,21.747 15.717,21.239 U1.16
  Top Layer 1 w0.3: v1(6.985,19.558) 7.598,20.171 10.155,20.171 10.59,20.606 11.049,20.606 ; v1(8.625,14.659) 8.625,13.854 8.636,13.843 ; U2.1 8.199,15.621 7.874,15.296 C9.1 8.636,13.843 ; C10.1 8.636,13.843 ; C6.1 11.049,20.606 ; C5.1 12.827,20.828 12.605,20.606 11.049,20.606
  Bottom Layer 2 w0.3: v1(6.985,19.558) 8.625,17.918 v1(8.625,14.659)
  Bottom Layer 1 w0.3: v1(8.625,14.659) 8.625,14.3 9.463,13.462 10.287,13.462 10.49,13.259 C36.1 C37.1 11.811,11.411 11.576,11.176 L2.2
AGND: C5.2 C6.2 C9.2 C10.2 C15.2 C17.2 C21.1 C22.1 C36.2 C37.2 FB2.2 P2.3 U1.15 U2.3 U2.9 | length 88.6
  Top Layer 1 w0.25: U2.3 10.254,16.921 10.351,17.018 11.843,17.018 12.383,16.479 C17.2 ; v1(16.062,21.636) 16.062,21.569 16.117,21.514 U1.15
  Top Layer 1 w0.3: U2.3 8.031,16.921 7.747,16.637 7.747,15.854 6.752,14.859 v1(6.096,14.859) ; U2.9 7.47,20.821 6.097,19.448 6.097,14.86 v1(6.096,14.859) ; v1(10.343,19.371) 10.382,19.333 10.576,19.333 10.986,18.923 C6.2 ; C10.2 10.49,13.779 9.716,13.005 6.834,13.005 6.096,13.743 C9.2 v1(6.096,14.859) ; v1(11.049,24.003) C15.2 C5.2 ; C22.1 14.001,11.303 14.329,10.975 v1(14.329,10.581)
  Top Layer 2 w0.3: P2.3 3.1,12.62 5.339,14.859 v1(6.096,14.859) ; v1@10.343,19.36 v1(10.343,19.371)
  Bottom Layer 2 w0.3: v1(6.096,14.859) 7.131,14.859 7.987,14.003 9.169,14.003 9.818,13.354 11.541,13.354 12.068,12.827 14.329,12.827 ; v1(10.343,19.371) 12.337,17.377 14.329,17.377 ; v1(11.049,24.003) 12.93,22.122 15.577,22.122 v1@16.1,21.598 ; v1(14.329,10.581) 14.329,12.827 ; v1(16.062,21.636) 16.062,19.11 14.329,17.377 ; 14.329,12.827 14.329,17.377
  Bottom Layer 1 w0.3: v1(6.096,14.859) 7.429,14.859 9.398,12.89 C36.2 ; C37.2 13.559,12.827 13.864,12.522 FB2.2 14.414,12.522 15.525,11.411 15.525,10.435 14.991,9.901 ; C21.1 13.284,8.194 14.991,9.901 ; v1(14.329,10.581) 14.991,9.919 14.991,9.901
BACK: SW3.2 U1.2 | length 30
  Top Layer 1 w0.2: U1.2 21.317,20.649 21.739,21.072 v1(22.472,21.072)
  Bottom Layer 2 w0.2: v1(1.633,20.434) 2.4,20.434 9.011,27.045 16.444,27.045 22.417,21.072 v1(22.472,21.072)
  Bottom Layer 1 w0.2: v1(1.633,20.434) 2.029,20.434 2.7,21.105 SW3.2
BAT_LEVEL: R17.1 R18.2 U1.14 | length 23.9
  Top Layer 1 w0.2: v1(11.995,3.725) 11.998,3.728 11.998,4.075 12.192,4.269 R18.2 ; v1@12.047,3.778 12.047,3.769 12.133,3.683 R17.1 ; U1.14 16.517,21.303 16.709,21.495 v1(16.709,21.577)
  Top Layer 2 w0.2: v1(11.995,3.725) 11.995,7.395 14.986,10.386 14.986,10.784 v1(14.975,10.795)
  Bottom Layer 2 w0.2: v1(14.975,10.795) 14.975,17.458 16.462,18.944 16.462,21.329 v1(16.709,21.577)
BOOT: R3.1 U1.63 | length 1.6
  Top Layer 1 w0.2: U1.63 R3.1
DAC_GPIO3: U1.29 U2.15 | length 20.3
  Top Layer 1 w0.2: U2.15 v1@4.52,24.071 ; v1(12.106,14.58) 12.695,14.58 13.081,14.966 U1.29
  Top Layer 2 w0.2: v1(4.572,24.071) 4.072,23.571 4.072,17.364 4.365,17.071 9.882,17.071 12.05,14.902 12.05,14.636 v1(12.106,14.58)
DAC_GPIO4: U1.30 U2.14 | length 20.8
  Top Layer 1 w0.2: v1(7.112,24.071) U2.14 ; v1(12.147,13.931) 12.229,13.931 12.386,14.089 12.705,14.089 13.182,14.566 U1.30
  Top Layer 2 w0.2: v1(7.112,24.071) 7.112,23.28 8.892,21.5 11.62,21.5 13.434,19.685 13.843,19.685 14.169,19.359 14.169,15.367 13.485,14.684 12.916,14.684 12.164,13.931 v1(12.147,13.931)
DAC_GPIO5: U1.31 U2.13 | length 18.8
  Top Layer 1 w0.2: v1@7.73,23.421 U2.13 ; v1(12.684,13.565) 13.285,14.166 U1.31
  Top Layer 2 w0.2: v1(7.678,23.421) 9.249,21.85 11.765,21.85 13.579,20.035 13.988,20.035 14.519,19.504 14.519,15.223 13.63,14.334 13.453,14.334 v1(12.684,13.565)
DAC_GPIO6: U1.32 U2.19 | length 23.7
  Top Layer 1 w0.2: U2.19 v1@4.52,21.471 ; v1(13.353,13.494) 13.625,13.766 U1.32
  Top Layer 2 w0.2: v1(4.572,21.471) 4.572,22.479 6.664,24.571 7.433,24.571 9.804,22.2 11.91,22.2 13.724,20.385 14.133,20.385 14.869,19.649 14.869,15.01 v1(13.353,13.494)
DAC_XSMT: U1.19 U2.25 | length 16.4
  Top Layer 1 w0.2: U2.25 v1@4.52,17.571 ; v1(13.669,19.147) 13.75,19.147 13.931,18.966 U1.19
  Top Layer 2 w0.2: v1(4.572,17.571) 5.148,17.571 5.298,17.421 10.027,17.421 12.414,15.034 13.34,15.034 13.669,15.362 v1(13.669,19.147)
DGND: BT1.2 C1.1 C2.1 C3.1 C4.1 C8.1 C11.2 C12.2 C13.2 C14.2 C16.2 C18.1 C19.1 C20.2 C23.1 C24.1 C25.1 C26.1 C27.1 C28.1 C29.1 C30.2 C31.1 C32.1 C33.1 C34.1 C35.2 C38.1 C39.1 C40.1 D1.1 D2.1 FB2.1 P3.1 P3.12 P4.0 P4.6 P4.10 Q1.2 R3.2 R8.1 R14.1 R15.1 R16.1 R17.2 R19.1 SW1.0 SW2.0 SW3.0 SW4.0 SW5.0 U1.0 U1.4 U1.8 U1.21 U1.34 U1.50 U1.67 U2.16 U2.17 U2.24 U2.27 U3.1 U3.5 U3.6 U3.12 U4.2 U5.2 U6.2 | length 10.4
  Top Layer 1 w0.25: U3.5 8.896,26.169 9.474,25.59 C28.1 ; U1.34 15.131,12.966 15.256,13.091 15.442,13.091 U1.0
  Bottom Layer 1 w0.3: 14.351,4.699 14.438,4.786 14.438,5.196 14.809,5.567 P3.12 ; P3.1 21.209,5.567 21.58,5.196 21.58,4.786 21.667,4.699
  other v1: 1.026,1.026 2.026,1.026 1.026,2.026 2.026,2.026 18.026,2.026 11.884,2.632 1.026,3.026 2.026,3.026 11.683,3.085 24.421,3.253 23.026,7.026 15.026,9.026 23.275,9.846 16.418,9.91 1.026,10.026 17.989,10.17 1.026,11.026 5.4,12.925 17.022,13.5 1.026,15.026 19.571,16.557 16.913,18.708 11.938,19.939 5.334,21.209 6.858,21.59 14.971,23.089 22.026,25.026 10.225,25.425 2.026,26.026 3.026,26.026 4.026,26.026 16.026,26.026 22.026,26.026 24.026,26.026 9.098,26.169 1.026,27.026 4.026,27.026 5.026,27.026 20.026,27.026 25.026,27.026 1.026,28.026 4.026,28.026 5.026,28.026 22.026,28.026 25.026,28.026 1.026,29.026 2.026,29.026 3.026,29.026 4.026,29.026 5.026,29.026 15.026,29.026 16.026,29.026 17.026,29.026 22.026,29.026 23.026,29.026 24.026,29.026 25.026,29.026
I2C1_SCL: R2.2 U1.61 U2.12 | length 25.1
  Top Layer 1 w0.2: U2.12 10.045,22.771 10.299,23.025 10.299,24.523 10.541,24.765 R2.2 v1(10.973,25.527) ; U1.61 23.055,16.566 23.253,16.368 23.92,16.368 24.376,15.912 v1(24.376,15.866)
  Top Layer 2 w0.2: v1(10.973,25.527) 11.755,25.527 12.263,25.019 14.964,25.019 17.867,22.116 18.273,21.709 18.273,19.927 21.835,16.366 23.829,16.366 24.329,15.866 v1(24.376,15.866)
I2C1_SDA: R1.2 U1.62 U2.11 | length 28.1
  Top Layer 1 w0.2: U2.11 10.183,22.121 10.42,22.358 13.288,22.358 13.577,22.647 13.577,23.888 13.386,24.079 R1.2 v1(13.386,25.583) ; U1.62 23.15,16.966 23.302,16.813 23.398,16.718 24.065,16.718 24.406,16.377 24.753,16.377 25.034,16.096 v1(25.034,15.735)
  Top Layer 2 w0.2: v1(13.386,25.583) 13.439,25.583 13.653,25.369 15.109,25.369 18.217,22.261 18.623,21.854 18.623,20.072 21.98,16.716 24.456,16.716 25.034,16.138 v1(25.034,15.735)
I2S1_CK: U1.24 U2.21 | length 12.9
  Top Layer 1 w0.2: U2.21 v1@4.52,20.171 ; v1(11.988,18.923) 12.019,18.923 13.013,17.929 13.013,17.594 13.641,16.966 U1.24
  Top Layer 2 w0.2: v1(4.572,20.171) 10.78,20.171 11.988,18.963 v1(11.988,18.923)
I2S1_MCK: U1.27 U2.20 | length 16
  Top Layer 1 w0.2: U2.20 v1@4.52,20.821 ; v1(13.143,15.544) 13.571,15.544 13.793,15.766 U1.27
  Top Layer 2 w0.2: v1(4.572,20.821) 4.629,20.821 4.929,20.521 12.103,20.521 13.143,19.481 v1(13.143,15.544)
I2S1_SDO: U1.26 U2.22 | length 13.7
  Top Layer 1 w0.2: U2.22 v1@4.52,19.521 ; v1(12.502,15.652) 12.544,15.652 12.936,16.044 13.576,16.044 13.698,16.166 U1.26
  Top Layer 2 w0.2: v1(4.572,19.521) 4.572,18.642 5.443,17.771 10.384,17.771 v1(12.502,15.652)
I2S1_WS: U1.23 U2.23 | length 13.4
  Top Layer 1 w0.2: U2.23 v1(5.08,18.871) ; v1@12.566,19.221 12.566,18.872 13.363,18.074 13.363,17.738 13.736,17.366 U1.23
  Top Layer 2 w0.2: v1(5.08,18.871) 11.228,18.871 11.676,18.423 12.235,18.423 12.565,18.753 v1(12.565,19.222)
LCD_CS: U1.43 U3.8 | length 24.7
  Top Layer 1 w0.2: v1(10.996,26.195) U3.8 ; U1.43 18.517,11.566 18.617,11.466 18.617,9.93 v1(18.653,9.894)
  Bottom Layer 2 w0.2: v1(10.996,26.195) 11.012,26.195 12.474,24.733 14.523,24.733 17.842,21.414 17.842,12.638 18.653,11.827 v1(18.653,9.894)
LCD_DC: U1.44 U3.7 | length 25.9
  Top Layer 1 w0.2: v1(10.296,26.195) U3.7 ; U1.44 18.917,11.766 18.967,11.716 18.967,10.561 19.178,10.35 v1(19.178,10.277)
  Bottom Layer 2 w0.2: v1(10.296,26.195) 10.296,26.202 10.789,26.695 12.001,26.695 12.7,25.996 12.7,25.562 13.032,25.23 13.179,25.083 14.668,25.083 18.192,21.559 18.192,12.783 19.003,11.972 19.003,10.533 19.178,10.358 v1(19.178,10.277)
LCD_RES: U1.45 U3.11 | length 21.4
  Top Layer 1 w0.2: U3.11 13.096,26.389 13.198,26.287 v1(13.198,26.206) ; U1.45 19.317,11.242 19.456,11.103
  Bottom Layer 2 w0.2: v1(13.198,26.206) 13.2,26.203 13.548,26.203 14.079,25.672 14.574,25.672 17.646,22.599 18.542,21.704 18.542,12.928 19.513,11.957 v1(19.513,10.834)
NetBT1_1: BT1.1 FB1.1 U4.3 | length 6.8
  Top Layer 1 w0.3: BT1.1 15.261,1.524 16,2.263 16.15,2.413 U4.3 17.145,2.413 17.526,2.794 17.526,4.572 17.018,5.08 FB1.1
NetC7_1: C7.1 U2.2 | length 2.1
  Top Layer 1 w0.3: U2.2 10.265,16.271 10.473,16.479 C7.1
NetC7_2: C7.2 U2.4 | length 2
  Top Layer 1 w0.3: U2.4 C7.2
NetC15_1: C15.1 U2.10 | length 2
  Top Layer 1 w0.3: U2.10 9.925,21.471 9.933,21.463 C15.1
NetC17_1: C17.1 U2.5 | length 3.6
  Top Layer 1 w0.3: U2.5 11.733,18.221 12.383,17.571 C17.1
NetC29_2: C29.2 C30.1 D2.2 P3.2 P3.11 U4.4 | length 16.7
  Top Layer 1 w0.3: U4.4 19.25,2.413 19.45,2.613 v1(19.865,3.028) 19.983,3.028 20.511,3.556 C29.2 D2.2
  Bottom Layer 2 w0.3: v1(16.256,7.789) 19.865,4.18 v1(19.865,3.028)
  Bottom Layer 1 w0.3: P3.11 15.609,7.142 v1(16.256,7.789) ; v1(19.865,3.028) 19.865,4.574 20.409,5.117 P3.2
NetC31_2: C31.2 C38.2 FB1.2 R18.1 U5.1 U5.3 U6.1 U6.3 | length 17.6
  Top Layer 1 w0.3: R18.1 C38.2 13.513,6.274 13.655,6.416 U6.1 13.655,7.94 13.97,8.255 15.24,8.255 15.366,8.129 15.555,7.94 U6.3 ; FB1.2 15.926,6.212 15.555,6.583 U6.3 ; C31.2 19.736,6.302 19.878,6.445 U5.1 ; U5.3 21.778,7.94 21.589,8.129 21.463,8.255 20.193,8.255 19.878,7.94 U5.1 ; U6.3 U5.1
NetC32_2: C32.2 U5.4 | length 1.9
  Top Layer 1 w0.2: U5.4 21.778,9.739 22.373,9.144 C32.2
NetC34_2: C34.2 P3.0 R19.2 | length 9
  Bottom Layer 1 w0.3: P3.0@23.119,1.212 24.834,1.212 25.146,1.524 R19.2 ; P3.0@23.119,5.142 24.575,5.142 25.082,5.65 C34.2
  Bottom Layer 1 w1: P3.0@23.119,1.212 P3.0@23.119,5.142
NetC39_2: C39.2 U6.4 | length 1.9
  Top Layer 1 w0.2: U6.4 15.555,9.739 16.15,9.144 C39.2
NetC40_2: C40.2 L2.1 U6.5 | length 4.3
  Top Layer 1 w0.3: C40.2 12.954,9.093 ; v1(12.954,9.779) 12.954,9.093 ; U6.5 13.655,9.337 13.411,9.093 12.954,9.093
  Bottom Layer 1 w0.3: L2.1 12.827,9.96 12.954,9.833 v1(12.954,9.779)
NetLED1_2: LED1.2 R4.2 | length 1.8
  Top Layer 1 w0.2: LED1.2 24.892,9.517 ; 24.893,9.518 R4.2
NetP3_4: P3.4 R15.2 | length 5
  Top Layer 1 w0.2: R15.2 v1(19.259,1.524)
  Bottom Layer 1 w0.2: v1(19.259,1.524) P3.4
NetP3_10: P3.10 R16.2 | length 5
  Top Layer 1 w0.2: R16.2 v1(16.259,1.524)
  Bottom Layer 1 w0.2: v1(16.259,1.524) P3.10
NetQ1_3: Q1.3 U3.2 | length 12.1
  Top Layer 1 w0.3: U3.2 6.796,26.277 v1(6.828,26.245) ; v1(15.367,28.059) Q1.3
  Bottom Layer 2 w0.3: v1(6.828,26.245) 8.642,28.059 v1(15.367,28.059)
NetR5_2: R5.2 U3.3 | length 2.5
  Top Layer 1 w0.3: R5.2 7.049,25.591 7.496,26.038 U3.3
NetR6_2: R6.2 U2.6 | length 10.4
  Top Layer 1 w0.3: v1(7.112,16.571) 7.112,18.161 7.822,18.871 U2.6
  Top Layer 2 w0.3: v1(7.112,16.571) 7.52,16.163 7.52,14.987 8.729,13.777 9.66,13.777 11.203,12.235 v1(11.224,12.235)
NetR7_2: R7.2 U2.7 | length 14.6
  Top Layer 1 w0.3: v1(6.968,15.937) 6.547,16.358 6.547,18.233 7.836,19.521 U2.7
  Top Layer 2 w0.3: v1(6.968,15.937) 6.968,14.752 8.441,13.278 9.367,13.278 11.9,10.746 11.9,10.452 v1(11.938,10.414)
  Bottom Layer 1 w0.3: v1(11.938,10.414) 12.192,10.16 R7.2
NetR14_2: R14.2 U4.5 | length 4.4
  Top Layer 1 w0.2: U4.5 19.817,4.313 20.063,4.067 21.339,4.067 22.149,4.877 R14.2
NEXT: SW5.2 U1.3 | length 40.6
  Top Layer 1 w0.2: U1.3 v1(20.917,21.082)
  Bottom Layer 2 w0.2: v1(2.286,6.477) 2.286,12.319 3.57,13.603 9.003,13.603 9.652,12.954 11.249,12.954 12.126,12.076 12.126,11.314 13.914,9.526 15.649,9.526 15.781,9.394 18.86,9.394 18.864,9.398 19.006,9.398 20.447,10.839 20.447,20.612 v1(20.917,21.082)
  Bottom Layer 1 w0.2: v1(2.286,6.477) 2.7,6.063 SW5.2
OUT_L: C22.2 P2.1 R6.1 | length 3.9
  Top Layer 1 w0.3: P2.1 10.668,8.842 10.668,10.541 10.82,10.693 R6.1 C22.2
OUT_R: C21.2 P2.2 R7.1 | length 4.2
  Bottom Layer 1 w0.3: P2.2 10.703,6.007 11.419,6.724 11.867,6.724 12.192,7.048 C21.2 R7.1
PLAY: SW4.2 U1.17 | length 20.8
  Top Layer 1 w0.2: v1(15.192,20.883) 15.192,20.802 15.317,20.677 U1.17
  Bottom Layer 2 w0.2: v1(2.029,14.862) 3.813,14.862 6.221,17.27 6.221,19.683 6.731,20.193 9.263,20.193 10.792,21.722 14.845,21.722 15.192,21.374 v1(15.192,20.883)
  Bottom Layer 1 w0.2: v1(2.029,14.862) 2.7,14.191 SW4.2
RCC_OSC_IN: C16.1 U1.10 XTAL1.1 | length 6.8
  Top Layer 1 w0.2: U1.10 18.117,21.304 17.608,21.812 17.608,23.558 18.483,24.433 XTAL1.1 C16.1
RCC_OSC_OUT: C20.1 U1.11 XTAL1.2 | length 5.4
  Top Layer 1 w0.2: C20.1 15.065,22.276 15.522,22.733 16.483,22.733 17.258,21.957 17.258,21.668 17.717,21.209 U1.11
RESET: C1.2 U1.12 | length 6.1
  Top Layer 1 w0.2: v1(17.054,21.003) 17.317,20.74 U1.12
  Bottom Layer 1 w0.2: v1(17.054,21.003) 17.478,20.579 21.227,20.579 21.653,21.006 C1.2
SD_DET: P4.9 U1.41 | length 14
  Top Layer 1 w0.2: v1(17.399,11.303) 17.717,11.621 U1.41
  Top Layer 2 w0.2: v1(9.271,14.732) 10.293,13.711 10.619,13.711 12.819,11.51 15.834,11.51 16.486,10.859 16.955,10.859 v1(17.399,11.303)
  Bottom Layer 1 w0.2: P4.9 8.128,15.875 v1(9.271,14.732)
SDMMC1_CK: P4.5 U1.56 | length 15
  Top Layer 1 w0.2: U1.56 24.076,14.566 24.176,14.466 v1(24.257,14.466)
  Bottom Layer 1 w0.2: P4.5 14.728,18.582 15.361,19.215 18.758,19.215 23.036,14.937 23.786,14.937 v1(24.257,14.466)
SDMMC1_CMD: P4.3 R11.1 U1.57 | length 24.3
  Top Layer 1 w0.2: U1.57 24.471,14.966 24.614,14.823 24.837,14.6 v1(24.837,14.173)
  Bottom Layer 1 w0.2: R11.1 14.148,13.906 13.068,14.986 12.462,14.986 12.002,15.445 12.002,16.096 12.528,16.622 12.528,18.471 12.704,18.647 14.298,18.647 15.216,19.565 18.903,19.565 23.181,15.287 24.143,15.287 24.837,14.593 v1(24.837,14.173)
SDMMC1_D0: P4.7 R12.1 U1.37 | length 9.7
  Top Layer 1 w0.2: U1.37@16.117,12.242 16.117,11.766 16.463,11.42 16.694,11.42 v1(16.752,11.363)
  Bottom Layer 1 w0.2: v1(16.752,11.363) 17.767,12.378 17.767,12.775 18.652,13.66 18.652,14.455 18.421,14.686 17.608,14.686 17.054,15.24 R12.1 16.636,15.669 16.928,15.961 P4.7
SDMMC1_D1: P4.8 R13.1 U1.42 | length 8.1
  Top Layer 1 w0.2: v1(18.117,11.266) U1.42
  Bottom Layer 1 w0.2: P4.8 18.028,16.172 18.034,16.166 R13.1 18.513,15.24 19.002,14.751 19.002,13.516 18.117,12.63 v1(18.117,11.266)
SDMMC1_D2: P4.1 R9.1 U1.54 | length 20.5
  Top Layer 1 w0.2: U1.54 23.304,13.766 23.52,13.55 24.053,13.55 v1(24.304,13.801)
  Top Layer 2 w0.2: v1(10.033,14.802) 10.08,14.755 10.08,14.471 10.49,14.061 10.764,14.061 12.204,12.621 23.124,12.621 23.838,13.335 v1(24.304,13.801)
  Bottom Layer 1 w0.2: v1(10.033,14.802) R9.1 10.033,15.723 10.328,16.018 P4.1
SDMMC1_D3: P4.2 R10.1 U1.55 | length 17.4
  Top Layer 1 w0.2: U1.55 23.53,14.166 23.63,14.066 v1(23.711,14.066)
  Top Layer 2 w0.2: v1@11.43,14.802 11.43,13.9 12.359,12.971 22.615,12.971 v1(23.711,14.066)
  Bottom Layer 1 w0.2: R10.1 P4.2 P4.2@11.43,17.27
  other v1: 11.428,14.802
SPI3_MOSI: U1.60 U3.10 | length 20.5
  Top Layer 1 w0.2: U3.10 12.396,26.463 12.7,26.159 v1(12.7,24.13) ; U1.60 22.96,16.166 23.26,15.866 v1(23.622,15.866)
  Top Layer 2 w0.2: v1(12.7,24.13) 15.358,24.13 17.923,21.565 17.923,19.782 21.84,15.866 v1(23.622,15.866)
SPI3_SCK: U1.58 U3.9 | length 24.7
  Top Layer 1 w0.2: U3.9 11.696,25.92 11.519,25.743 11.519,24.386 11.777,24.128 11.784,24.128 11.865,24.048 v1(11.946,24.048) ; U1.58 24.697,15.366 24.977,15.086 v1(25.058,15.086)
  Top Layer 2 w0.2: v1(11.946,24.048) 11.949,24.048 12.407,23.589 15.404,23.589 17.573,21.42 17.573,19.638 22.125,15.086 v1(25.058,15.086)
SWCLK: P1.1 U1.52 | length 3.5
  Top Layer 1 w0.2: U1.52 23.114,12.966 23.556,12.524 v1(24.036,12.524)
  Bottom Layer 1 w0.2: v1(24.036,12.524) 24.511,12.049 P1.1
SWDIO: P1.2 U1.48 | length 3.6
  Top Layer 1 w0.2: U1.48 20.517,11.534 21.172,10.879 21.623,10.879 22.104,11.36 v1(22.866,11.36)
TIM2_CH1: R4.1 U1.53 | length 3.4
  Top Layer 1 w0.2: U1.53 23.209,13.366 23.496,13.079 24.386,13.079 24.893,12.572 R4.1
TIM2_CH2: D1.2 Q1.1 R8.2 U1.18 | length 21.5
  Top Layer 1 w0.2: U1.18 14.617,21.201 v1(14.637,21.222) ; v1(16.891,27.305) 17.145,27.559 Q1.1 R8.2 D1.2
  Top Layer 2 w0.2: v1(14.637,21.222) 12.745,23.114 11.049,23.114 9.695,24.468 9.695,26.302 10.699,27.305 v1(16.891,27.305)
USB_OTG_HS_DM: P3.5 P3.7 U1.46 | length 10
  Top Layer 1 w0.2: U1.46 19.717,11.337 20.447,10.607 v1(20.447,9.017)
  Bottom Layer 1 w0.2: P3.7 17.759,5.101 17.907,4.953 18.606,4.953 18.759,5.106 P3.5 18.759,7.329 v1(20.447,9.017)
USB_OTG_HS_DP: P3.6 P3.8 U1.47 | length 10.1
  Top Layer 1 w0.2: U1.47 20.117,11.439 20.947,10.609 v1(20.947,9.537)
  Bottom Layer 1 w0.2: P3.8 17.259,6.578 17.412,6.731 18.259,6.731 ; P3.6 18.259,6.731 ; v1(20.947,9.537) 20.26,9.537 18.259,7.536 18.259,6.731
VCAP: C2.2 C3.2 C4.2 C8.2 L1.1 U1.7 U1.33 U1.49 U1.66 | length 39.1
  Top Layer 1 w0.25: C4.2 13.711,12.7 13.942,12.931 13.942,13.205 14.103,13.366 U1.33 ; v1(19.177,21.175) 19.177,20.753 19.317,20.613 U1.7 ; U1.49 20.917,11.664 21.154,11.427 21.331,11.427 v1(21.379,11.379) ; U1.66 23.202,18.566 24.003,19.367 C3.2
  Top Layer 1 w0.3: C4.2 13.284,12.221 13.43,12.075 v1(13.43,12.02) ; L1.1 v1(20.701,23.495) C2.2 ; C3.2 24.003,20.072 v1(24.041,20.111)
  Top Layer 2 w0.3: v1(13.43,12.02) 20.738,12.02 v1(21.379,11.379) ; v1(19.177,21.175) 19.177,22.606 20.066,23.495 v1(20.701,23.495) 21.279,23.495 24.041,20.733 v1(24.041,20.111)
  Bottom Layer 2 w0.3: v1(21.379,11.379) 21.379,17.449 v1(24.041,20.111)
  Bottom Layer 1 w0.3: C8.2 19.685,13.073 v1(21.379,11.379)
VLX_SMPS: C11.1 L1.2 U1.5 | length 6
  Top Layer 1 w0.25: U1.5 20.117,21.081 20.662,21.627 21.6,21.627 22.479,22.506 L1.2@22.479,22.706 ; C11.1@23.368,24.066 C11.1
  Top Layer 1 w0.3: L1.2@22.479,22.706 22.95,23.177 22.95,23.648 C11.1@23.368,24.066
VOL+: SW2.2 U1.65 | length 9.2
  Top Layer 1 w0.2: U1.65 23.335,18.166 23.754,18.584 24.114,18.584 24.563,19.033 24.563,21.332 23.876,22.019 v1(23.876,23.241)
  Bottom Layer 1 w0.2: SW2.2 23.3,23.817 v1(23.876,23.241)
VOL–: SW1.2 U1.64 | length 3.3
  Top Layer 1 w0.2: U1.64 23.43,17.766 23.691,18.026 23.903,18.026 v1(23.96,18.083)
  Bottom Layer 1 w0.2: SW1.2 23.3,17.423 v1(23.96,18.083)
pads on no net: P3. P3.3 P3.9 SW2. SW3. SW4. SW5. U1.13 U1.20 U1.25 U1.28 U1.36 U1.38 U1.39 U1.40 U1.59 U4.1 XTAL1.0

## Polygon pours and split planes (outlines as drawn)
DGND on Bottom Layer 2 "GND_BOT" (solid, remove dead copper, pour order 1): 0,30 0,0 26,0 26,30
DGND on Top Layer 2 "GND_BOT" (solid, remove dead copper, pour order 2): 0,30 0,0 26,0 26,30
DGND on Bottom Layer 1 "GND_BOT" (solid, remove dead copper, pour order 0): 0,30 0,0 26,0 26,30
DGND on Top Layer 1 "GND_BOT" (solid, remove dead copper, pour order 3): 0,30 0,0 26,0 26,30

## Other copper
Top Layer 1:
  region net DGND: 19.042,20.466 18.792,20.466 18.792,19.336 19.042,19.336
  region net DGND: 20.642,20.466 20.392,20.466 20.392,19.336 20.642,19.336
  region net DGND: 14.217,18.291 14.217,18.041 15.347,18.041 15.347,18.291
  region net DGND: 22.817,18.841 22.817,19.091 21.687,19.091 21.687,18.841
  rectangle net DGND: 21.192,11.866 21.442,12.996
Bottom Layer 1:
  rectangle net NetC34_2: 12.395,1.212 13.397,5.142

## Silkscreen, mask and mechanical layers (free items; w line width, h text height)
Bottom Overlay:
  lines w0.2: 14.8,7.4 23.8,7.4 ; 15.367,12.573 22.225,12.573
  text "qsivey" at 22.182,10.886 h1.25
  text "MicroPlayer v2.0" at 25.354,7.934 h2
Board:
  the board outline again, w0.4
Top Draw:
  circle w0.2: c2.5,27.5 r2.2
  circle w0.2: c2.5,27.5 r1.1
  circle w0.2: c23.5,27.5 r1.1
  circle w0.2: c23.5,27.5 r2.2
  lines w0.5: 4,-2 3,-2 cw(c3,3) -2,3 -2,27 cw(c3,27) 3,32 5.5,32 ; 9.5,-2 12,-2 ; 21,32 23,32 cw(c23,27) 28,27 28,9.5 ; 23,-2 ccw(c23,3) 28,3 28,6.5